# EAGLE board PFOP (EAGLE 9.1.3)
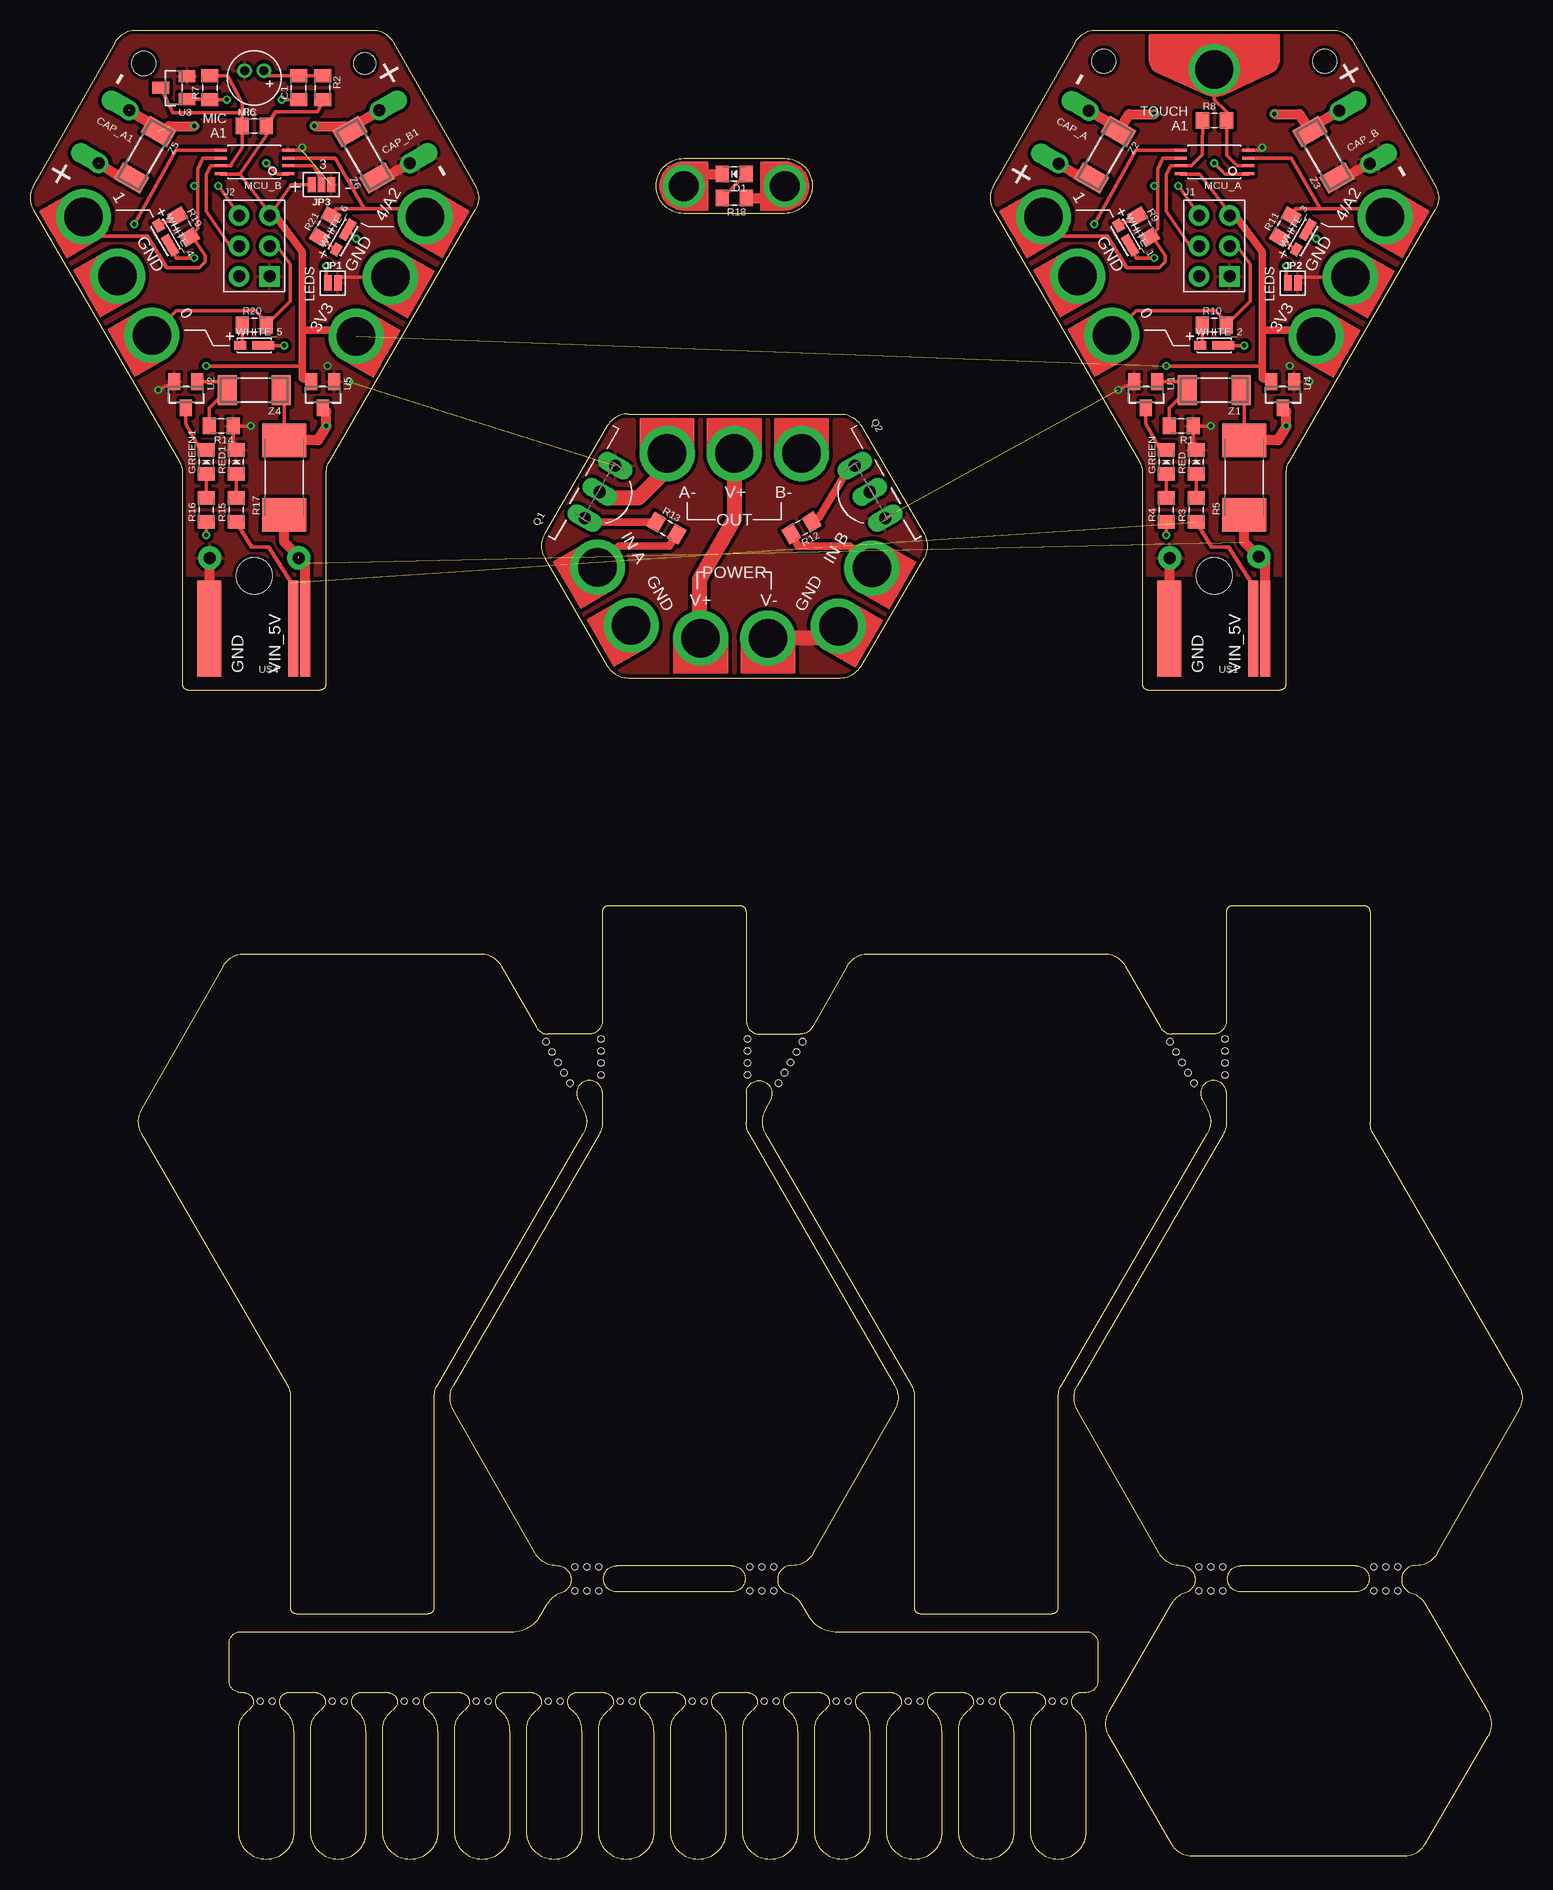
[diagram p0: board, top side]
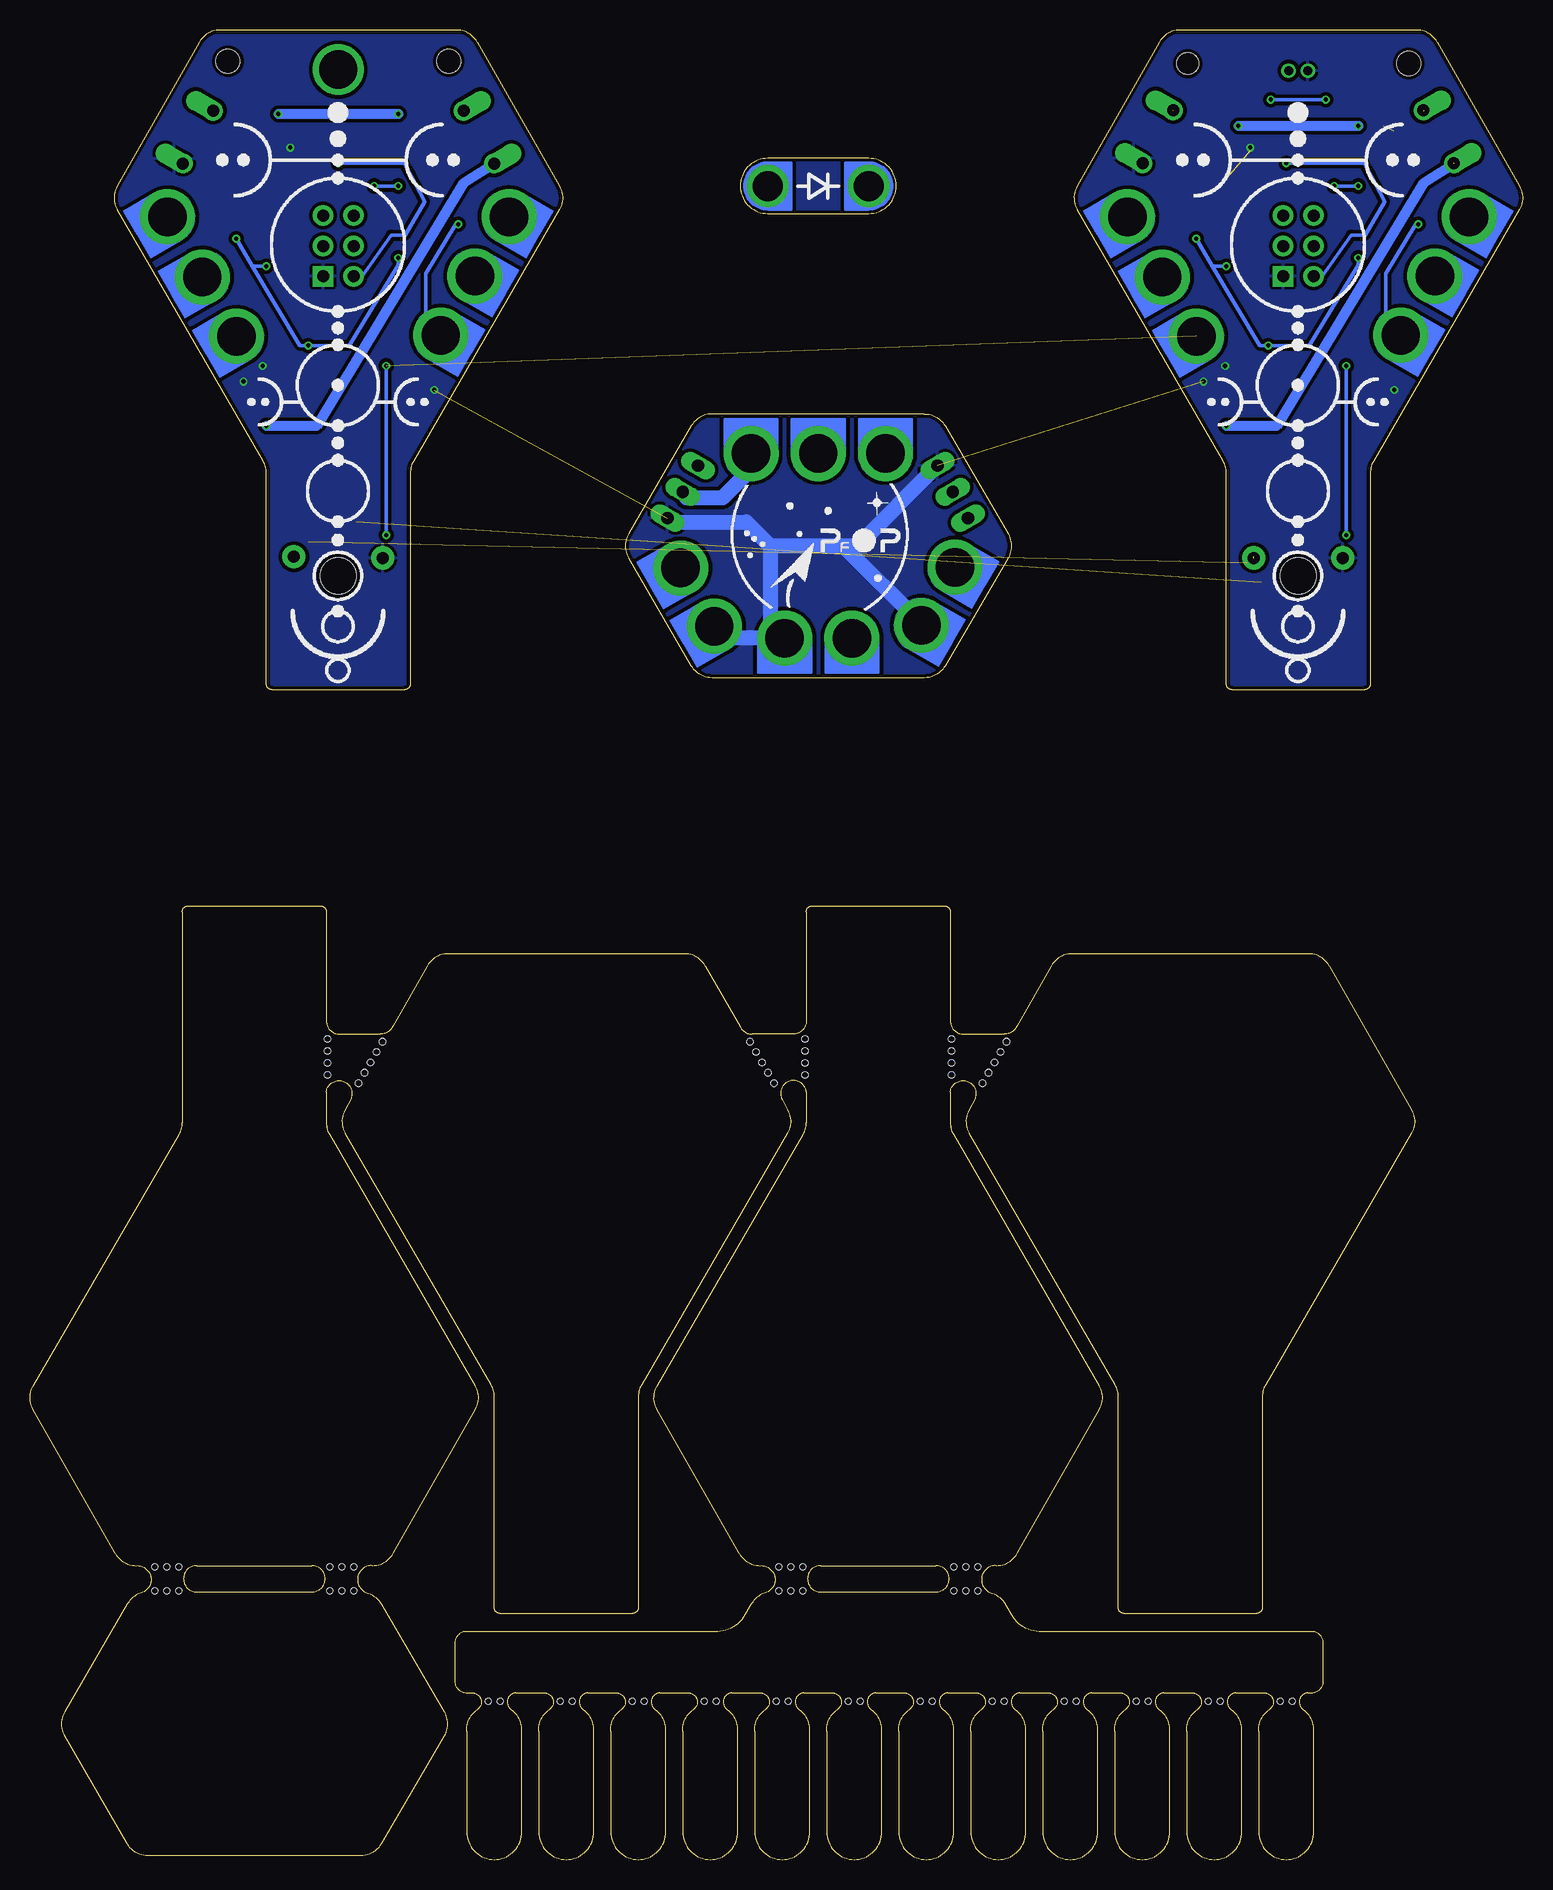
[diagram p1: board, bottom side, seen from below]

Size 124.38 x 152.5 mm. Coordinates in mm from the lower left corner, seen from the top.
Outline: 87.11,151.49 80.26,139.5 arc60 80.27,137.5 92.42,116.57 arc-30 92.69,115.56 92.69,98 arc90 93.19,97.5 104.19,97.5 arc90 104.69,98 104.69,115.56 arc-30 104.96,116.57 117.11,137.5 arc60 117.12,139.5 110.27,151.49 arc60 108.53,152.5 88.85,152.5 arc60 87.11,151.49
Outline: 49.84,120.5 67.54,120.5 arc-60 69.27,119.51 74.51,110.51 arc-60 74.51,108.49 69.27,99.49 arc-60 67.54,98.5 49.84,98.5 arc-60 48.11,99.49 42.88,108.49 arc-60 42.88,110.51 48.11,119.51 arc-60 49.84,120.5
Outline: 7.11,151.49 0.26,139.5 arc60 0.27,137.5 12.42,116.57 arc-30 12.69,115.56 12.69,98 arc90 13.19,97.5 24.19,97.5 arc90 24.69,98 24.69,115.56 arc-30 24.96,116.57 37.11,137.5 arc60 37.12,139.5 30.27,151.49 arc60 28.53,152.5 8.85,152.5 arc60 7.11,151.49
Outline: 54.49,141.8 62.89,141.8 arc-90 65.19,139.5 arc-90 62.89,137.2 54.49,137.2 arc-90 52.19,139.5 arc-90 54.49,141.8
Outline: 65.27,25.51 72.12,37.5 arc60 72.11,39.5 59.96,60.43 arc-30 59.69,61.44 59.69,64 arc-200 61.71,63.36 61.26,62.5 arc60 61.27,60.5 73.42,39.57 arc-30 73.69,38.56 73.69,21 arc90 74.19,20.5 85.19,20.5 arc90 85.69,21 85.69,38.56 arc-30 85.96,39.57 98.11,60.5 arc60 98.12,62.5 97.67,63.36 arc-200 99.69,64 99.69,61.44 arc-30 99.42,60.43 87.27,39.5 arc60 87.26,37.5 94.11,25.51 arc60 95.85,24.5 arc-170 96.19,22.2 arc40 95.11,21.31 89.88,12.31 arc60 89.88,10.29 95.11,1.29 arc60 96.84,0.3 114.54,0.3 arc60 116.27,1.29 121.51,10.29 arc60 121.51,12.31 116.27,21.31 arc40 115.19,22.2 arc-170 115.53,24.5 arc60 117.27,25.51 124.12,37.5 arc60 124.11,39.5 111.96,60.43 arc-30 111.69,61.44 111.69,69.9 111.69,79 arc90 111.19,79.5 100.19,79.5 arc90 99.69,79 99.69,69.9 arc-90 98.59,68.8 95.19,68.8 arc-65 94.17,69.42 91.27,74.49 arc60 89.53,75.5 69.85,75.5 arc60 68.11,74.49 65.21,69.42 arc-65 64.19,68.8 60.79,68.8 arc-90 59.69,69.9 59.69,79 arc90 59.19,79.5 48.19,79.5 arc90 47.69,79 47.69,69.9 arc-90 46.59,68.8 43.19,68.8 arc-65 42.17,69.42 39.27,74.49 arc60 37.53,75.5 17.85,75.5 arc60 16.11,74.49 9.26,62.5 arc60 9.27,60.5 21.42,39.57 arc-30 21.69,38.56 21.69,21 arc90 22.19,20.5 33.19,20.5 arc90 33.69,21 33.69,38.56 arc-30 33.96,39.57 46.11,60.5 arc60 46.12,62.5 45.67,63.36 arc-200 47.69,64 47.69,61.44 arc-30 47.42,60.43 35.27,39.5 arc60 35.26,37.5 42.11,25.51 arc60 43.85,24.5 arc-170 44.19,22.2 arc40 43.11,21.31 42.42,20.19 arc-58 40.29,19 17.59,19 arc90 16.59,18 16.59,14.9 arc90 17.59,13.9 17.89,13.9 arc-140 18.29,12.5 arc60 17.39,10.7 17.39,2.3 arc90 19.69,0 arc90 21.99,2.3 21.99,10.7 arc60 21.09,12.5 arc-140 21.49,13.9 23.89,13.9 arc-140 24.29,12.5 arc60 23.39,10.7 23.39,2.3 arc90 25.69,0 arc90 27.99,2.3 27.99,10.7 arc60 27.09,12.5 arc-140 27.49,13.9 29.89,13.9 arc-140 30.29,12.5 arc60 29.39,10.7 29.39,2.3 arc90 31.69,0 arc90 33.99,2.3 33.99,10.7 arc60 33.09,12.5 arc-140 33.49,13.9 35.89,13.9 arc-140 36.29,12.5 arc60 35.39,10.7 35.39,2.3 arc90 37.69,0 arc90 39.99,2.3 39.99,10.7 arc60 39.09,12.5 arc-140 39.49,13.9 41.89,13.9 arc-140 42.29,12.5 arc60 41.39,10.7 41.39,2.3 arc90 43.69,0 arc90 45.99,2.3 45.99,10.7 arc60 45.09,12.5 arc-140 45.49,13.9 47.89,13.9 arc-140 48.29,12.5 arc60 47.39,10.7 47.39,2.3 arc90 49.69,0 arc90 51.99,2.3 51.99,10.7 arc60 51.09,12.5 arc-140 51.49,13.9 53.89,13.9 arc-140 54.29,12.5 arc60 53.39,10.7 53.39,2.3 arc90 55.69,0 arc90 57.99,2.3 57.99,10.7 arc60 57.09,12.5 arc-140 57.49,13.9 59.89,13.9 arc-140 60.29,12.5 arc60 59.39,10.7 59.39,2.3 arc90 61.69,0 arc90 63.99,2.3 63.99,10.7 arc60 63.09,12.5 arc-140 63.49,13.9 65.89,13.9 arc-140 66.29,12.5 arc60 65.39,10.7 65.39,2.3 arc90 67.69,0 arc90 69.99,2.3 69.99,10.7 arc60 69.09,12.5 arc-140 69.49,13.9 71.89,13.9 arc-140 72.29,12.5 arc60 71.39,10.7 71.39,2.3 arc90 73.69,0 arc90 75.99,2.3 75.99,10.7 arc60 75.09,12.5 arc-140 75.49,13.9 77.89,13.9 arc-140 78.29,12.5 arc60 77.39,10.7 77.39,2.3 arc90 79.69,0 arc90 81.99,2.3 81.99,10.7 arc60 81.09,12.5 arc-140 81.49,13.9 83.89,13.9 arc-140 84.29,12.5 arc60 83.39,10.7 83.39,2.3 arc90 85.69,0 arc90 87.99,2.3 87.99,10.7 arc60 87.09,12.5 arc-140 87.49,13.9 87.99,13.9 arc90 88.99,14.9 88.99,18 arc90 87.99,19 67.09,19 arc-58 64.96,20.19 64.27,21.31 arc40 63.19,22.2 arc-170 63.53,24.5 arc60 65.27,25.51
Outline: 100.89,22.3 arc-180 100.89,24.5 110.49,24.5 arc-180 110.49,22.3 100.89,22.3
Outline: 48.89,22.3 arc-180 48.89,24.5 58.49,24.5 arc-180 58.49,22.3 48.89,22.3
Copper layers (1*16): Top 0.035mm / dielectric 1.6mm / Bottom 0.035mm
Design rules "Elecrow_2-layer_PCB_eagle_rule *": minimum track width 6mil, minimum drill 12mil, track to track 6mil, track to pad 6mil, pad to pad 6mil, via to via 8mil, smd to smd 0mil, copper to edge 0.2mm, drill to drill 0mil, minimum pad ring 6mil, minimum via ring 6mil, stop-mask expansion 0mil, vias tented up to drill 100mil, thermal gap 10mil
Holes 3 mm at 98.69,107 18.69,107
Holes 2 mm at 9.49,149.7 89.49,149.9 107.89,149.9
Holes 1.8 mm at 27.89,149.7
Holes 0.5 mm at 43.01,68.17 43.51,67.31 44.01,66.44 44.51,65.58 45.01,64.71 47.59,65.4 47.59,66.4 47.59,67.4 47.59,68.4 64.37,68.17 63.87,67.31 63.37,66.44 62.87,65.58 62.37,64.71 59.79,65.4 59.79,66.4 59.79,67.4 59.79,68.4 95.01,68.17 95.51,67.31 96.01,66.44 96.51,65.58 97.01,64.71 99.59,65.4 99.59,66.4 99.59,67.4 99.59,68.4 99.39,22.4 98.39,22.4 97.39,22.4 99.39,24.4 98.39,24.4 97.39,24.4 113.99,22.4 112.99,22.4 111.99,22.4 113.99,24.4 112.99,24.4 111.99,24.4 85.19,13.2 86.19,13.2 79.19,13.2 80.19,13.2 73.19,13.2 74.19,13.2 67.19,13.2 68.19,13.2 61.19,13.2 62.19,13.2 55.19,13.2 56.19,13.2 49.19,13.2 50.19,13.2 43.19,13.2 44.19,13.2 37.19,13.2 38.19,13.2 31.19,13.2 32.19,13.2 25.19,13.2 26.19,13.2 19.19,13.2 20.19,13.2 47.39,22.4 46.39,22.4 45.39,22.4 47.39,24.4 46.39,24.4 45.39,24.4 61.99,22.4 60.99,22.4 59.99,22.4 61.99,24.4 60.99,24.4 59.99,24.4

## Footprints (pad centres in the part's own frame; a part is rotated, then mirrored left to right if it is on the bottom)
0805 = smd 1.1 x 1.4: 1 -1,0; 2 1,0
SUPERCAP_2.7V-4.7F = drill 1 pad 1.676 offset: + 2.54,3.81; - -2.54,3.81
0805_LED = smd 1.1 x 1.4: + -1,0; - 1,0
ISP_HEADER = drill 1 pad 1.676 square: GND 1.27,-2.54 | drill 1 pad 1.676: MISO -1.27,2.54; MOSI 1.27,0; RESET -1.27,-2.54; SCK -1.27,0; VCC 1.27,2.54
SMT-JUMPER_2_NO_NO-SILK = smd 0.635 x 1.27: 1 -0.406,0; 2 0.406,0
SMT-JUMPER_3_NO_NO-SILK = smd 0.635 x 1.27: 1 -0.813,0; 2 0,0; 3 0.813,0
TSSOP-8 = smd 1 x 0.25: 1 -2.813,0.975; 2 -2.813,0.325; 3 -2.813,-0.325; 4 -2.813,-0.975; 5 2.813,-0.975; 6 2.813,-0.325; 7 2.813,0.325; 8 2.813,0.975
ELECTRET_4.5MM = drill 0.75 pad 1.2: + 0.8,0.6; - -0.8,0.6
POWER_TRANSISTOR = drill 1.016 long: B -2.54,0; C 0,0; E 2.54,0
2512 = smd 2.8 x 3.7: 1 -3.1,0; 2 3.1,0
BIGTAP = drill 3.2 pad 4.572: P$1 0,0
BIGTAP_TOUCH = drill 3.2 pad 3.683: P$1 0,0
SEQUIN_TERMINAL = drill 2.5: P$1 0,0
SOT23 = smd 1.4 x 1: 1 -1.1,0.95; 2 -1.1,-0.95; 3 1.1,0
USB_CONN_POWER = smd 0.8 x 8: 5V_A -4.25,-0.1; 5V_B -3.25,-0.1 | smd 2 x 8: GND 3.75,-0.1
1PIN = drill 1 pad 1.93: P$1 0,0
PLCC-2_LED = smd 1 x 0.7: + -1.15,0 | smd 1.8 x 0.7: - 0.75,0
MINIMELF = smd 1.6 x 2.5: 1 -2.25,0; 2 2.25,0

## Placement (x,y rotation side)
C1  0.1uF  [0805]  22.39,147.7 90 top
CAP_A  4.7F  [SUPERCAP_2.7V-4.7F]  83.68,145.46 240 top
CAP_A1  4.7F  [SUPERCAP_2.7V-4.7F]  3.69,145.5 240 top
CAP_B  4.7F  [SUPERCAP_2.7V-4.7F]  113.68,145.46 120 top
CAP_B1  4.7F  [SUPERCAP_2.7V-4.7F]  33.69,145.5 120 top
D1  LED0805  [0805_LED]  58.69,140.5 180 top
GREEN  LED  [0805_LED]  94.69,116.5 90 top
GREEN1  LED  [0805_LED]  14.69,116.5 90 top
J1  ISP_HEADER  [ISP_HEADER]  98.69,134.5 0 top
J2  ISP_HEADER  [ISP_HEADER]  18.69,134.5 0 top
JP1  JUMPER  [SMT-JUMPER_2_NO_NO-SILK]  25.25,131.42 0 top
JP2  JUMPER  [SMT-JUMPER_2_NO_NO-SILK]  105.25,131.42 0 top
JP3  JUMPER  [SMT-JUMPER_3_NO_NO-SILK]  24.29,139.6 180 top
MCU_A  ATTINY45  [TSSOP-8]  98.69,141.5 180 top
MCU_B  ATTINY45  [TSSOP-8]  18.69,141.5 180 top
MIC  ELECTRET  [ELECTRET_4.5MM]  18.69,148.5 0 top
Q1  [POWER_TRANSISTOR]  47.49,114 60 top
Q2  [POWER_TRANSISTOR]  69.99,114 300 top
R1  10k  [0805]  95.94,119.5 180 top
R2  10k  [0805]  24.39,147.7 270 top
R3  100R  [0805]  97.19,112.5 90 top
R4  100R  [0805]  94.69,112.5 90 top
R5  5.6R  [2512]  101.19,115.2 90 top
R6  10k  [0805]  18.69,144.5 0 top
R7  100k  [0805]  14.99,147.7 90 top
R8  2.2M  [0805]  98.71,144.96 0 top
R9  100R  [0805]  92.79,136.1 300 top
R10  100R  [0805]  98.69,127.9 0 top
R11  100R  [0805]  104.59,136.1 60 top
R12  2.2k  [0805]  64.29,111 210 top
R13  2.2k  [0805]  53.04,110.99 330 top
R14  10k  [0805]  15.94,119.5 180 top
R15  100R  [0805]  17.19,112.5 90 top
R16  100R  [0805]  14.69,112.5 90 top
R17  5.6R  [2512]  21.19,115.2 90 top
R18  [0805]  58.69,138.5 180 top
R19  100R  [0805]  12.79,136.1 300 top
R20  100R  [0805]  18.69,127.9 0 top
R21  100R  [0805]  24.59,136.1 60 top
RED  LED  [0805_LED]  97.19,116.5 90 top
RED1  LED  [0805_LED]  17.19,116.5 90 top
TP1  SEWTAPBIG  [BIGTAP]  84.45,136.93 120 top
TP2  SEWTAPBIG  [BIGTAP]  90.15,127.06 120 top
TP3  SEWTAPBIG  [BIGTAP]  112.93,136.93 240 top
TP4  SEWTAPBIG  [BIGTAP]  110.03,131.91 240 top
TP5  SEWTAPBIG  [BIGTAP]  87.3,131.99 120 top
TP6  SEWTAPBIG  [BIGTAP]  107.18,126.97 240 top
TP7  SEWTAP  [BIGTAP_TOUCH]  98.69,149.2 0 top
TP8  SEWTAPBIG  [BIGTAP]  53.09,117.2 0 top
TP9  SEWTAPBIG  [BIGTAP]  64.29,117.2 0 top
TP10  SEWTAPBIG  [BIGTAP]  70.16,107.65 240 top
TP11  SEWTAPBIG  [BIGTAP]  47.29,107.72 120 top
TP12  SEWTAPBIG  [BIGTAP]  58.69,117.2 0 top
TP13  SEWTAPBIG  [BIGTAP]  55.89,101.8 180 top
TP14  SEWTAPBIG  [BIGTAP]  67.36,102.8 240 top
TP15  SEWTAPBIG  [BIGTAP]  50.09,102.87 120 top
TP16  SEWTAPBIG  [BIGTAP]  61.49,101.8 180 top
TP17  SEWTAPBIG  [BIGTAP]  4.45,136.93 120 top
TP18  SEWTAPBIG  [BIGTAP]  10.15,127.06 120 top
TP19  SEWTAPBIG  [BIGTAP]  32.93,136.93 240 top
TP20  SEWTAPBIG  [BIGTAP]  30.03,131.91 240 top
TP21  SEWTAPBIG  [BIGTAP]  7.3,131.99 120 top
TP22  SEWTAPBIG  [BIGTAP]  27.18,126.97 240 top
TP23  SEWTAPSEQUIN  [SEQUIN_TERMINAL]  54.49,139.5 0 top
TP24  SEWTAPSEQUIN  [SEQUIN_TERMINAL]  62.89,139.5 180 top
U1  2N7002  [SOT23]  92.99,122.1 270 top
U2  2N7002  [SOT23]  12.99,122.1 270 top
U3  BC847  [SOT23]  11.99,147.7 180 top
U4  3.3V  [SOT23]  104.39,122.1 270 top
U5  3.3V  [SOT23]  24.39,122.1 270 top
U$1  USB_CONN_POWER  [USB_CONN_POWER]  98.69,102.5 180 top
U$2  1PIN  [1PIN]  102.39,108.6 0 top
U$3  1PIN  [1PIN]  94.99,108.5 0 top
U$4  USB_CONN_POWER  [USB_CONN_POWER]  18.69,102.5 180 top
U$5  1PIN  [1PIN]  22.39,108.5 0 top
U$6  1PIN  [1PIN]  14.99,108.5 0 top
WHITE_1  LED  [PLCC-2_LED]  91.29,135.2 300 top
WHITE_2  LED  [PLCC-2_LED]  98.69,126.2 0 top
WHITE_3  LED  [PLCC-2_LED]  106.09,135.2 60 top
WHITE_4  LED  [PLCC-2_LED]  11.29,135.2 300 top
WHITE_5  LED  [PLCC-2_LED]  18.69,126.2 0 top
WHITE_6  LED  [PLCC-2_LED]  26.09,135.2 60 top
Z1  5.1V  [MINIMELF]  98.69,122.5 180 top
Z2  2.7V  [MINIMELF]  89.59,142.1 240 top
Z3  2.7V  [MINIMELF]  107.79,142.1 120 top
Z4  5.1V  [MINIMELF]  18.69,122.5 180 top
Z5  2.7V  [MINIMELF]  9.59,142.1 240 top
Z6  2.7V  [MINIMELF]  27.79,142.1 120 top

## Library data of the parts
C1 CAP_A CAP_A1 CAP_B CAP_B1 D1 GREEN GREEN1 J1 J2 JP1-JP3 MCU_A MCU_B MIC Q1 Q2 R1-R21 RED RED1 TP1-TP24 U1-U5 U$1-U$6 WHITE_1-WHITE_6 Z1-Z6 = PFOP

## Nets
A_0: J1.MOSI MCU_A.5 R10.2 TP2.P$1
A_1: J1.MISO MCU_A.6 R9.2 TP1.P$1
A_2: J1.SCK MCU_A.7 R8.1
A_3: MCU_A.2 R8.2 TP7.P$1
A_4: MCU_A.3 R11.2 TP3.P$1
A_GND: Q1.C TP8.P$1
A_IN: R13.2 TP11.P$1
A_RESET: J1.RESET MCU_A.1
B_0: J2.MOSI MCU_B.5 R20.2 TP18.P$1
B_1: J2.MISO MCU_B.6 R19.2 TP17.P$1
B_2: J2.SCK MCU_B.7 R6.1 R7.2 U3.3
B_3: JP3.2 MCU_B.2
B_4: MCU_B.3 R21.2 TP19.P$1
B_GND: Q2.C TP9.P$1
B_IN: R12.2 TP10.P$1
B_RESET: J2.RESET MCU_B.1
CHARGE_LED: R3.1 R15.1 U$1.5V_B U$4.5V_B
GND: CAP_B1.- CAP_B.- J1.GND J2.GND JP1.2 JP2.2 JP3.1 MCU_A.4 MCU_B.4 MIC.- Q1.E Q2.E R1.1 R14.1 RED1.- RED.- TP4.P$1 TP5.P$1 TP14.P$1 TP15.P$1 TP16.P$1 TP20.P$1 TP21.P$1 U1.2 U2.2 U3.2 U4.1 U5.1 U$1.GND U$3.P$1 U$4.GND U$6.P$1 Z3.1 Z6.1
N$1: R3.2 RED.+
N$2: R15.2 RED1.+
N$3: R1.2 U1.1 Z1.2
N$4: GREEN.- U1.3
N$5: CAP_A.- CAP_B.+ Z2.1 Z3.2
N$6: R14.2 U2.1 Z4.2
N$7: GREEN.+ R4.2
N$8: C1.2 MIC.+ R2.1
N$9: GREEN1.- U2.3
N$10: C1.1 R7.1 U3.1
N$11: Q2.B R12.1
N$12: CAP_A1.- CAP_B1.+ Z5.1 Z6.2
N$13: GREEN1.+ R16.2
N$14: R9.1 WHITE_1.+
N$15: R10.1 WHITE_2.+
N$16: R11.1 WHITE_3.+
N$17: JP2.1 WHITE_1.- WHITE_2.- WHITE_3.-
N$18: R19.1 WHITE_4.+
N$19: R20.1 WHITE_5.+
N$20: Q1.B R13.1
N$21: R21.1 WHITE_6.+
N$22: JP1.1 WHITE_4.- WHITE_5.- WHITE_6.-
N$23: R18.1 TP24.P$1
N$24: D1.+ R18.2
N$25: D1.- TP23.P$1
V_POWER: TP12.P$1 TP13.P$1
VCAP: CAP_A.+ R5.2 U4.3 Z1.1 Z2.2
VCAP1: CAP_A1.+ R17.2 U5.3 Z4.1 Z5.2
VCC: J1.VCC J2.VCC JP3.3 MCU_A.8 MCU_B.8 R2.2 R4.1 R6.2 R16.1 TP6.P$1 TP22.P$1 U4.2 U5.2
VCHARGE: R5.1 R17.1 U$1.5V_A U$2.P$1 U$4.5V_A U$5.P$1

## Tracks (layer width: path | path; a pad name or v marks a point on that pad's centre or on a via)
A_0  (via drill 0.35)
  Top 0.305: MCU_A.5 92.17,142.47 88.78,136.45 v88.69,136.3 | 91.39,128.29 arc-90 TP2.P$1 | TP2.P$1 91,127.9 | J1.MOSI 100.59,134.5 101.69,132.97 101.69,129.9 100.49,128.7 R10.2 99.69,128.2 98.79,129.1 92.2,129.1 TP2.P$1
  Bottom 0.305: v88.69,136.3 88.89,136.3 91.39,132.2 91.39,127.8 TP2.P$1
A_1  (via drill 0.35)
  Top 0.305: MCU_A.6 94.42,141.82 93.99,140.9 93.99,139.5 | 93.99,139.5 93.99,135.93 R9.2 93.59,135.2 94.59,133.7 94.59,133.2 94.09,132.7 91.39,132.7 89.79,135.3 88.29,135.3 85.48,135.3 TP1.P$1 | J1.MISO 95.89,139.27 v95.69,139.5 | v93.69,139.5 93.99,139.5
  Bottom 0.305: v95.69,139.5 v93.69,139.5
A_2
  Top 0.305: R8.1 97.69,142.5 97.69,142.1 96.77,141.18 MCU_A.7 95.07,141.18 94.69,140.5 94.69,137.4 96.69,134.5 J1.SCK
A_3
  Top 0.305: MCU_A.2 100.62,141.18 99.71,142.08 R8.2 99.71,145.68 98.69,146.7 TP7.P$1
A_4
  Top 0.305: 111.09,137.8 TP3.P$1 112.29,137.6 107.54,137.61 | 107.54,137.61 105.09,141.8 MCU_A.3 | R11.2 105.49,137.6 107.54,137.61
A_GND
  Top 1.27: TP8.P$1 53.09,115.9 50.69,113.5 47.99,113.5 Q1.C
  Bottom 1.27: 53.69,116.5 53.09,117.1 TP8.P$1
A_IN
  Top 0.61: TP11.P$1 49.07,109.5 53.29,109.5 R13.2
A_RESET  (via drill 0.35)
  Top 0.305: v98.69,141.4 99.59,140.5 101.53,140.5 MCU_A.1
  Bottom 0.305: v98.69,141.4 93.19,141.4 92.69,140.5 91.49,138.2 93.09,135.4 94.29,135.4 96.69,132 97.38,132 arc-90 J1.RESET
B_0  (via drill 0.35)
  Top 0.305: MCU_B.5 12.17,142.47 8.78,136.45 v8.69,136.3 | 11.39,128.29 arc-90 TP18.P$1 | TP18.P$1 11,127.9 | J2.MOSI 20.59,134.5 21.69,132.97 21.69,129.9 20.49,128.7 R20.2 19.69,128.2 18.79,129.1 12.2,129.1 TP18.P$1
  Bottom 0.305: v8.69,136.3 8.89,136.3 11.39,132.2 11.39,127.8 TP18.P$1
B_1  (via drill 0.35)
  Top 0.305: MCU_B.6 14.42,141.82 13.99,140.9 13.99,139.5 | 13.99,139.5 13.99,135.93 R19.2 13.59,135.2 14.59,133.7 14.59,133.2 14.09,132.7 11.39,132.7 9.79,135.3 8.29,135.3 5.48,135.3 TP17.P$1 | J2.MISO 15.89,139.27 v15.69,139.5 | v13.69,139.5 13.99,139.5
  Bottom 0.305: v15.69,139.5 v13.69,139.5
B_2
  Top 0.305: 16.77,141.18 16.69,141.18 | 16.69,141.18 MCU_B.7 15.07,141.18 14.69,140.5 14.69,137.4 16.69,134.5 J2.SCK | R7.2 16.49,148.7 17.69,146.38 17.69,145.6 | 17.69,145.6 R6.1 17.69,142.7 16.69,141.18 | U3.3 11.89,145.6 17.69,145.6
B_3
  Top 0.305: MCU_B.2 23.67,141.21 24.29,140.17 JP3.2
B_4
  Top 0.305: 31.09,137.8 TP19.P$1 32.29,137.6 27.94,137.61 27.87,137.61 | 27.87,137.61 25.43,141.8 MCU_B.3 | R21.2 25.49,137.6 27.54,137.61 27.87,137.61
B_GND
  Bottom 1.27: TP9.P$1 64.29,115.9 66.69,113.5 69.69,113.5 69.69,113.7 Q2.C
B_IN
  Top 0.61: TP10.P$1 68.31,109.5 64.02,109.5 R12.2
B_RESET  (via drill 0.35)
  Top 0.305: v19.69,141.4 20.59,140.5 21.53,140.5 MCU_B.1
  Bottom 0.305: v19.69,141.4 13.19,141.4 12.69,140.5 11.49,138.2 13.09,135.4 14.29,135.4 16.69,132 17.38,132 arc-90 J2.RESET
CHARGE_LED  (1 unrouted)
  Top 0.254: U$1.5V_B 101.79,102.75 101.79,106.45 | U$4.5V_B 21.79,102.75 21.79,106.45
  Top 0.305: R3.1 98.49,109.4 99.89,109.4 101.79,106.45 | R15.1 18.49,109.4 19.89,109.4 21.79,106.45
GND  (via drill 0.35)  (3 unrouted)
  Top 0.254: RED.- 96.94,117.75 | RED1.- 16.94,117.75
  Top 0.305: 96.94,117.75 R1.1 v98.39,119.5 | U1.2 v90.69,122.5 | MCU_A.4 102.67,142.47 v102.69,142.7 | JP2.2 arc-90 106.15,131.91 TP4.P$1 | 16.94,117.75 R14.1 v18.39,119.5 | U2.2 v10.69,122.5 | MCU_B.4 22.67,142.47 v22.69,142.7 | JP1.2 arc-90 26.15,131.91 TP20.P$1
  Top 0.813: Z3.1 109.24,140.15 109.29,140.1 CAP_B.- | U$1.GND U$3.P$1 | Z6.1 29.24,140.15 29.29,140.1 31.65,141.35 | U$4.GND U$6.P$1
  Top 1.27: TP14.P$1 66.36,101.8 62.69,101.8 TP16.P$1 62.69,103
  Bottom 0.813: 109.02,132.91 TP4.P$1 | 29.02,132.91 TP20.P$1
  Bottom 1.27: 60.79,102.5 TP16.P$1 66.36,101.8 TP14.P$1 | 61.69,101.5 62.69,102.5 62.69,107.6 62.69,109.5 | 50.89,102.87 TP15.P$1 50.09,103 56.59,109.5 | 56.59,109.5 62.69,109.5 | 56.49,109.5 56.59,109.5 | Q1.E 55.46,109.5 56.59,109.5 | Q2.E 70.96,111.5 64.69,111.5 62.69,109.5
  other vias: 106.59,123.2 26.59,123.2 104.99,124.5 24.79,124.5
  pour Bottom (isolate 0.305): 87.69,152.5 109.69,152.5 117.69,138.5 104.69,116.1 104.69,97.5 92.69,97.5 92.69,116.1 79.69,138.5
  pour Top (isolate 0.305): 87.69,152.5 109.69,152.5 117.69,138.5 104.69,116.1 104.69,107 92.69,107 92.69,116.1 79.69,138.5
  pour Bottom (isolate 0.305): 7.69,152.5 29.69,152.5 37.69,138.5 24.69,116.1 24.69,97.5 12.69,97.5 12.69,116.1 -0.31,138.5
  pour Top (isolate 0.305): 7.69,152.5 29.69,152.5 37.69,138.5 24.69,116.1 24.69,107 12.69,107 12.69,116.1 -0.31,138.5
  pour Bottom (isolate 0.305): 42.29,109.5 48.69,120.5 68.69,120.5 75.09,109.5 68.69,98.5 48.69,98.5
  pour Top (isolate 0.305): 48.69,120.5 68.69,120.5 75.09,109.5 68.69,98.5 48.69,98.5 42.29,109.5
  pour Bottom (isolate 0.3): 55.79,141.5 61.69,141.5 61.69,137.4 55.69,137.4 55.69,141.5
N$1
  Top 0.305: R3.2 RED.+
N$2
  Top 0.305: R15.2 RED1.+
N$3
  Top 0.305: R1.2 94.94,121 Z1.2 95.74,123.2 U1.1
N$4
  Top 0.254: 94.09,117.7 GREEN.-
  Top 0.305: U1.3 92.99,119.7 94.09,117.7
N$5  (via drill 0.35)  (1 unrouted)
  Top 0.813: CAP_A.- 90.19,144.6 90.72,144.07 Z2.1 91.59,145.5 v93.69,145.5 | CAP_B.+ 106.59,144.3 106.67,144.22 Z3.2 105.79,145.5 v103.69,145.5
  Bottom 0.813: v93.69,145.5 v103.69,145.5
N$6
  Top 0.305: R14.2 14.94,121 Z4.2 15.74,123.2 U2.1
N$7
  Top 0.305: R4.2 GREEN.+
N$8
  Top 0.305: R2.1 C1.2 19.89,148.7 MIC.+
N$9
  Top 0.254: 14.09,117.7 GREEN1.-
  Top 0.305: U2.3 12.99,119.7 14.09,117.7
N$10  (via drill 0.35)
  Top 0.305: C1.1 v20.99,146.7 | v16.39,146.7 R7.1 arc90 14.94,146.75 U3.1
  Bottom 0.305: v20.99,146.7 v16.39,146.7
N$11
  Top 0.61: Q2.B 68.09,115.77 65.79,111.9 65.49,111.7 R12.1
N$12  (via drill 0.35)  (3 unrouted)
  Top 0.813: 10.72,144.07 10.19,144.6 8.25,145.75 | 29.11,145.75 26.59,144.3 26.67,144.22 Z6.2 26.21,144.5 v23.69,144.5 | 11.59,144.5 v13.69,144.5 | Z5.1 10.72,144.07 | 10.72,144.07 arc-90 10.72,144.07
  Bottom 0.813: v13.69,144.5 v23.69,144.5
N$13
  Top 0.305: R16.2 GREEN1.+
N$14
  Top 0.305: WHITE_1.+ R9.1
N$15
  Top 0.305: WHITE_2.+ 97.69,126.35 R10.1
N$16
  Top 0.305: R11.1 WHITE_3.+
N$17  (via drill 0.35)
  Top 0.305: WHITE_2.- v101.19,126.2 | WHITE_3.- 107.19,135.12 v107.19,135.1 | JP2.1 arc-90 104.69,131.57 v104.69,132.8 | WHITE_1.- 92.19,133.5 v93.69,133.5 93.79,133.5
  Bottom 0.305: 105.85,132.82 101.89,126.2 v101.19,126.2 97.79,126.2 93.69,132.9 v93.69,133.5 | 105.85,132.82 v107.19,135.1 | v104.69,132.8 arc-90 104.91,132.82 105.85,132.82
N$18
  Top 0.305: WHITE_4.+ R19.1
N$19
  Top 0.305: WHITE_5.+ 17.69,126.35 R20.1
N$20
  Top 0.61: R13.1 46.69,111.5 Q1.B
N$21
  Top 0.305: R21.1 WHITE_6.+
N$22  (via drill 0.35)
  Top 0.305: WHITE_5.- v21.19,126.2 | WHITE_6.- 27.19,135.12 v27.19,135.1 | JP1.1 arc-90 24.69,131.57 v24.69,132.8 | WHITE_4.- 12.19,133.5 v13.69,133.5 13.79,133.5
  Bottom 0.305: 25.85,132.82 21.89,126.2 v21.19,126.2 17.79,126.2 13.69,132.9 v13.69,133.5 | 25.85,132.82 v27.19,135.1 | v24.69,132.8 arc-90 24.91,132.82 25.85,132.82
N$23
  Top 0.813: R18.1 61.89,138.5 TP24.P$1
N$24
  Top 0.3: R18.2 59.29,140.1
  Top 0.508: 59.29,140.1 D1.+
N$25
  Top 0.813: D1.- 55.49,140.5 TP23.P$1
V_POWER
  Top 1.27: TP13.P$1 55.79,101.9 55.79,106.69 58.69,111.73 TP12.P$1
VCAP  (via drill 0.35)  (2 unrouted)
  Top 0.305: R5.2 101.19,122.25
  Top 0.813: 101.19,122.25 Z1.1 | Z2.2 87.64,140.15 arc-90 87.59,140.2 CAP_A.+ | R5.2 103.99,118.3 v104.69,119.5 104.69,120.7 U4.3
  Bottom 0.813: CAP_A.+ 88.27,139.72 100.49,119.5 v104.69,119.5
VCAP1  (via drill 0.35)  (2 unrouted)
  Top 0.305: R17.2 21.19,122.25
  Top 0.813: 21.19,122.25 Z4.1 | Z5.2 7.64,140.15 | 7.64,140.15 arc-90 7.59,140.2 | R17.2 23.99,118.3 v24.69,119.5 24.69,120.7 U5.3 | CAP_A1.+ 7.64,140.15
  Bottom 0.813: 5.71,141.35 8.27,139.72 20.49,119.5 v24.69,119.5
VCC  (via drill 0.35)  (1 unrouted)
  Top 0.305: R4.1 v94.69,110.4 | v94.69,124.5 102.69,124.5 102.69,123.5 | 105.69,126.9 106.67,126.95 TP6.P$1 | MCU_A.8 95.9,140.5 97.49,140.5 99.96,137.23 J1.VCC | R16.1 v14.69,110.4 | v14.69,124.5 22.69,124.5 22.69,123.5 | 25.69,126.9 26.67,126.95 TP22.P$1 | MCU_B.8 15.9,140.5 16.69,140.5 17.49,140.5 | 17.49,140.5 17.56,140.4 | 17.56,140.4 | 17.56,140.4 19.96,137.23 J2.VCC 21.76,139.6 JP3.3 | 17.49,140.5 19.69,143.7 R6.2 20.49,145.7 23.99,145.7 R2.2
  Top 0.61: U4.2 102.69,123.5 102.69,127.5 | J1.VCC 100.45,137.04 100.49,137 102.69,134.01 102.69,127.5 | 102.69,127.5 106.12,127.5 106.67,126.95 | U5.2 22.69,123.5 22.69,127.5 | J2.VCC 20.45,137.04 20.49,137 22.69,134.01 22.69,127.5 | 22.69,127.5 26.12,127.5 26.67,126.95
  Bottom 0.305: v94.69,110.4 v94.69,124.5 | v14.69,110.4 v14.69,124.5
VCHARGE  (2 unrouted)
  Top 0.813: U$1.5V_A 102.94,108.05 U$2.P$1 101.19,109.8 R5.1 | U$4.5V_A 22.94,108.05 22.39,108.6 21.19,109.8 R17.1

## Text on the board
tPlace: TOUCH / A1 | MIC / A1 | 3 | 4/A2 | 4/A2 | 1 | + | - | 1 | GND | GND | GND | LEDS | GND | LEDS | 0 | 0 | 3V3 | 3V3 | A- | V+ | B- | OUT | IN A | IN B | POWER | GND | V+ | V- | GND | GND | VIN_5V | GND | VIN_5V